# Altium PCB LDOConverterPCB.PcbDoc
Units mm, origin at the board's own origin, x right, y up, seen from the top; angles counter-clockwise.
Board outline 23 x 8 mm, 2 copper layers (Top Layer, Bottom Layer); 5 components, 3 nets, 17 pads, 4 vias.
Unrouted connection lines stored in the file: 1.
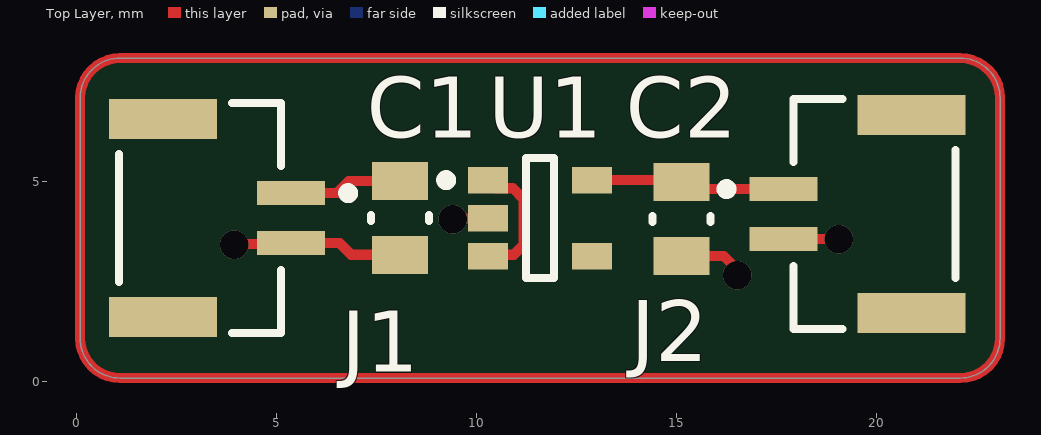
[diagram p0: Top Layer view]
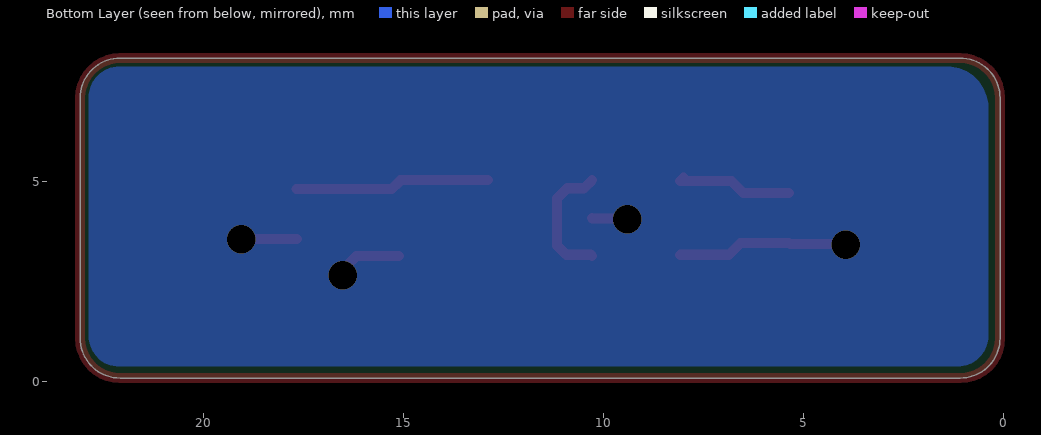
[diagram p1: Bottom Layer view, seen from below]
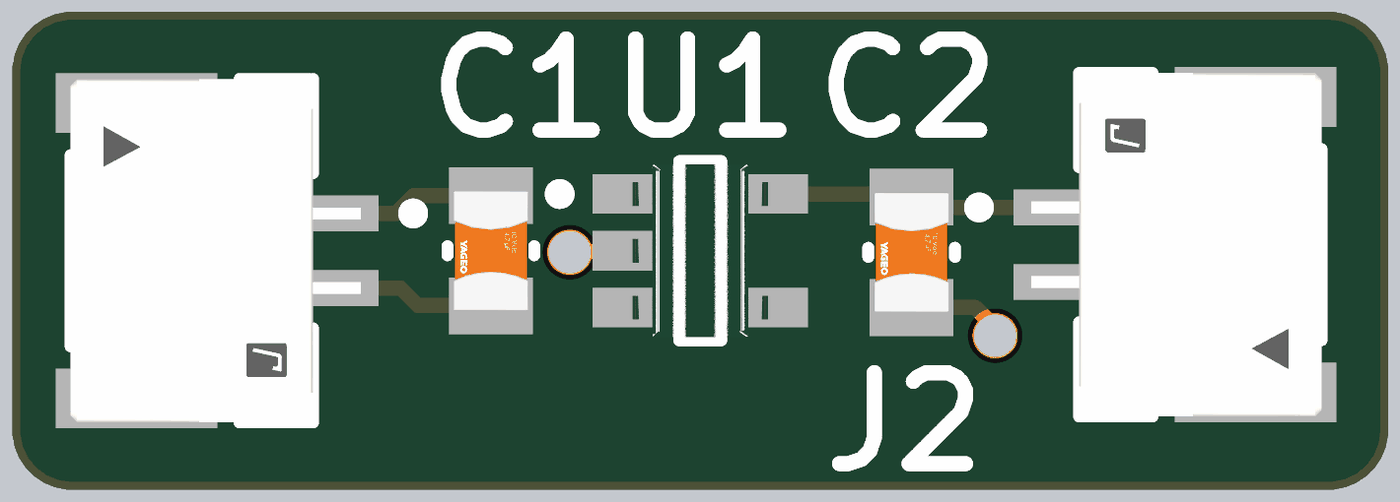
[diagram p2: 3D render of the assembled board from above, using the file's embedded part models]

## Layer stack, top to bottom
Top Solder: solder mask 0.0102, Solder Resist, Dk 3.5
Top Layer: signal copper 0.0356
Dielectric 1: dielectric 0.32, FR-4, Dk 4.8
Bottom Layer: signal copper 0.0356
Bottom Solder: solder mask 0.0102, Solder Resist, Dk 3.5

## Board outline
0.079,7.09 cw(c1.079,7.09) 1.079,8.09 22.079,8.09 cw(c22.079,7.09) 23.079,7.09 23.079,1.09 cw(c22.079,1.09) 22.079,0.09 20.872,0.09 1.079,0.09 cw(c1.079,1.09) 0.079,1.09

## Design rules (kind name [scope] priority, off if disabled: settings)
Clearance [All] p1: gap=0.254 ignorepadtopadclearanceinfootprint=FALSE
PolygonConnect [All] p1: connectstyle=Relief reliefconductorwidth=0.254 reliefentries=4 polygonreliefangle="90 Angle" airgapwidth=0.254
RoutingVias [All] p1: holewidth=0.711 width=1.27 viastyle="Through Hole" minholewidth=0.711 minwidth=1.27 maxholewidth=0.711 maxwidth=1.27
SolderMaskExpansion [All] p1: expansion=0.102 istentingtop=FALSE
SupplyNets "Schematic Supply Nets_2" [InNet('GND')] p1: voltage=0.000
SupplyNets "Schematic Supply Nets_1" [InNet('+3.3V')] p2: voltage=0.000
SupplyNets "Schematic Supply Nets" [InNet('+5V')] p3: voltage=0.000
Width [All] p1: maxlimit=0.254 minlimit=0.254 preferedwidth=0.254
30 further rules are at their usual default settings.

## Components (designator, comment, footprint, x,y, rotation, side; value= is the part's Value field where it differs from the comment)
C1 "1uf" FP-CC0805-0_85-MFG 8.079,4.09 r270 top value="1 uF"
C2 "1uf" FP-CC0805-0_85-MFG 15.113,4.064 r270 top value="1 uF"
J1 "SM02B-GHS-TB(LF)(SN)" FP-SM02B-GHS-TB_LF_SN-MFG#1 3.079,4.09 r270 top
J2 "SM02B-GHS-TB(LF)(SN)" FP-SM02B-GHS-TB_LF_SN-MFG#2 19.939,4.191 r270 top
U1 "MIC5317-3.3YM5-TR" FP-SOT23-5LD-PL-1-MFG 11.579,4.09 r0 top

## Footprints (in the part's own frame and the unit in brackets; to place one, negate y for a bottom-side part, rotate by r counter-clockwise, add the part's x,y. Pads: shape width x height; smd on the part's side, far side on the other; paste and mask are expansions set on the pad)
FP-CC0805-0_85-MFG [mm]
  rect 0.95x1.4 smd paste+0 mask+0: 1(-0.925,0) 2(0.925,0)
  silkscreen extent -0.08,-0.72 0.08,0.72, body extent -1.6,-1.05 1.6,1.05, height 0.25
FP-SM02B-GHS-TB_LF_SN-MFG#1 [mm]
  rect 0.6x1.7 smd paste+0 mask+0: 1(-0.625,2.275) 2(0.625,2.275)
  rect 1x2.7 smd paste+0 mask+0: 3(-2.475,-0.925) 4(2.475,-0.925)
  silkscreen extent -2.88,-2.02 2.88,3.83, body extent -3.08,-2.37 3.08,3.22, height 0.25
FP-SM02B-GHS-TB_LF_SN-MFG#2 [mm]
  rect 0.6x1.7 smd paste+0 mask+0: 1(-0.625,-2.275) 2(0.625,-2.275)
  rect 1x2.7 smd paste+0 mask+0: 3(-2.475,0.925) 4(2.475,0.925)
  silkscreen extent -2.88,-3.82 2.88,2.02, body extent -2.88,-2.83 2.88,2.02, height 4.35
FP-SOT23-5LD-PL-1-MFG [mm]
  rect 1x0.66 smd paste+0 mask+0: 1(-1.3,0.95) 2(-1.3,0) 3(-1.3,-0.95) 4(1.3,-0.95) 5(1.3,0.95)
  silkscreen extent -2.47,-1.5 0.35,1.5, body extent -1.9,-1.6 1.9,1.6, height 0.25

## Part data
C1 C2: library part CMP-03422-000746-1, "CAP CER 1UF 10V X5R 0805", Capacitance="1 uF", Manufacturer=Yageo, Manufacturer Part Number=CC0805KKX5R6BB105, Package=CC0805-0.85, Temperature="-30°C to +85°C", Temperature Characteristic=X5R, Temperature Range High=+85°C, Temperature Range Low=-30°C, Tolerance=0.1, Voltage Rating="10 V", Automotive=No, Category=Cap, ComponentLink2Description=Datasheet, ComponentLink2URL=http://www.yageo.com/documents/recent/UPY-GPHC_Y5V_6.3V-to-50V_8.pdf, Device Class L1="Passive Components", Device Class L2=Capacitors, Device Class L3="Ceramic Capacitors", Digikey Description="CAP CER 1UF 10V X5R 0805", Footprint Url=http://www.yageo.com/exep/pages/download/literatures/UPY-C_GEN_24.pdf, Height=0.95mm, Lead Free=Yes, Material=Ceramic, Mouser Description="Multilayer Ceramic Capacitors MLCC - SMD/SMT 1.0uF 10V X5R 10%", Octopart=https://octopart.com/cc0805kkx5r6bb105-yageo-9292777, RoHS=TRUE, Ipc Land Pattern Name=CAPC200125X85
J1 J2: library part CMP-2000-07076-2, "CONN HEADER SMD R/A 2POS 1.25MM", Color=Natural, Current Rating=1A, Package Quantity=2500, Voltage Rating=50V, Connector Type="Outer Shroud Contact", Contact Material=Bronze, Contact Plating=Tin, Contact Type="Male Pin", Fastening Type=Latch, Housing Color=Natural, Housing Material=Nylon, Lead Free="Lead Free", Mount="Surface Mount", Number of Contacts=2, Number of Positions=2, Number of Rows=1, Orientation="Right Angle", Packaging="Tape and Reel", Pitch=0.049inch, Series=GH, Termination=Solder
U1: library part CMP-06324-000116-1, "IC REG LINEAR 3.3V 150MA SOT23-5", Case/Package=SOT-23-5, Dropout Voltage=155mV, Max Operating Temperature=125°C, Max Input Voltage=6V, Min Current Limit=200mA, Min Operating Temperature=-40°C, Min Input Voltage=2.5V, Output Current=150mA, Output Voltage=3.3V, Package Quantity=3000, Power Supply Rejection Ratio (PSRR)=70dB, Mount="Surface Mount", Number of Outputs=1, Number of Regulators=1, Packaging="Tape and Reel", RoHS Compliant=No, Series=-

## Via types
v1: diameter 0.711, hole 0.711, Top Layer to Bottom Layer, 4 vias

## Nets (pads, with @x,y where several pads share a name; then routed paths per layer and width w, separated by ;. In a path a pad name is that pad's centre, name@x,y a point inside that pad or via, vN(x,y) a via of type N, cw(c..) or ccw(c..) an arc to the next point about the centre after c; other vN are vias at no path point)
+3.3V: C2.1 J2.1 U1.5 | length 4.9
  Top Layer w0.254: U1.5 15.062,5.04 C2.1 15.286,4.816 J2.1
+5V: C1.1 J1.1 U1.1 U1.3 | length 6.2
  Top Layer w0.254: J1.1 6.493,4.715 6.793,5.015 C1.1 C1.1@7.994,5.1 ; U1.3 10.314,3.175 10.922,3.175 11.16,3.413 11.16,4.578 10.901,4.837 10.482,4.837 U1.1
GND: C1.2 C2.2 J1.2 J2.2 U1.2 | length 8.2
  Top Layer w0.254: v1(3.937,3.429) 3.955,3.447 5.336,3.447 J1.2 6.568,3.465 6.858,3.175 8.069,3.175 C1.2 ; v1(9.398,4.064) 9.411,4.077 10.266,4.077 U1.2 ; C2.2 16.175,3.139 16.423,2.892 16.423,2.754 v1(16.51,2.667) ; J2.2 v1(19.05,3.566) v1@19.05,3.556
pads on no net: J1.3 J1.4 J2.3 J2.4 U1.4
copper on no net: | length 60.3
  Top Layer w0.254: 0.079,1.09 ccw(c1.079,1.09) 1.079,0.09 15.924,0.09 20.872,0.09 22.079,0.09 ccw(c22.079,1.09) 23.079,1.09 23.079,7.09 ccw(c22.079,7.09) 22.079,8.09 1.079,8.09 ccw(c1.079,7.09) 0.079,7.09 0.079,5.59 0.079,2.59 0.079,1.09

## Polygon pours and split planes (outlines as drawn)
GND on Bottom Layer "GND_L02_P000" (solid, pour order 0): 22.098,7.874 cw(c22.098,7.112) 22.86,7.112 22.86,1.143 cw(c22.098,1.143) 22.098,0.381 1.143,0.381 cw(c1.143,1.143) 0.381,1.143 0.381,6.858 cw(c1.397,6.858) 1.397,7.874